# Altium PCB PAPRika PCB.PcbDoc
Units mil, origin at the board's own origin, x right, y up, seen from the top; angles counter-clockwise.
Board outline 1299.21 x 556.69 mil, 2 copper layers (Top Layer, Bottom Layer), stack 27.8 mil thick; 14 components, 8 nets, 40 pads, 3 vias.
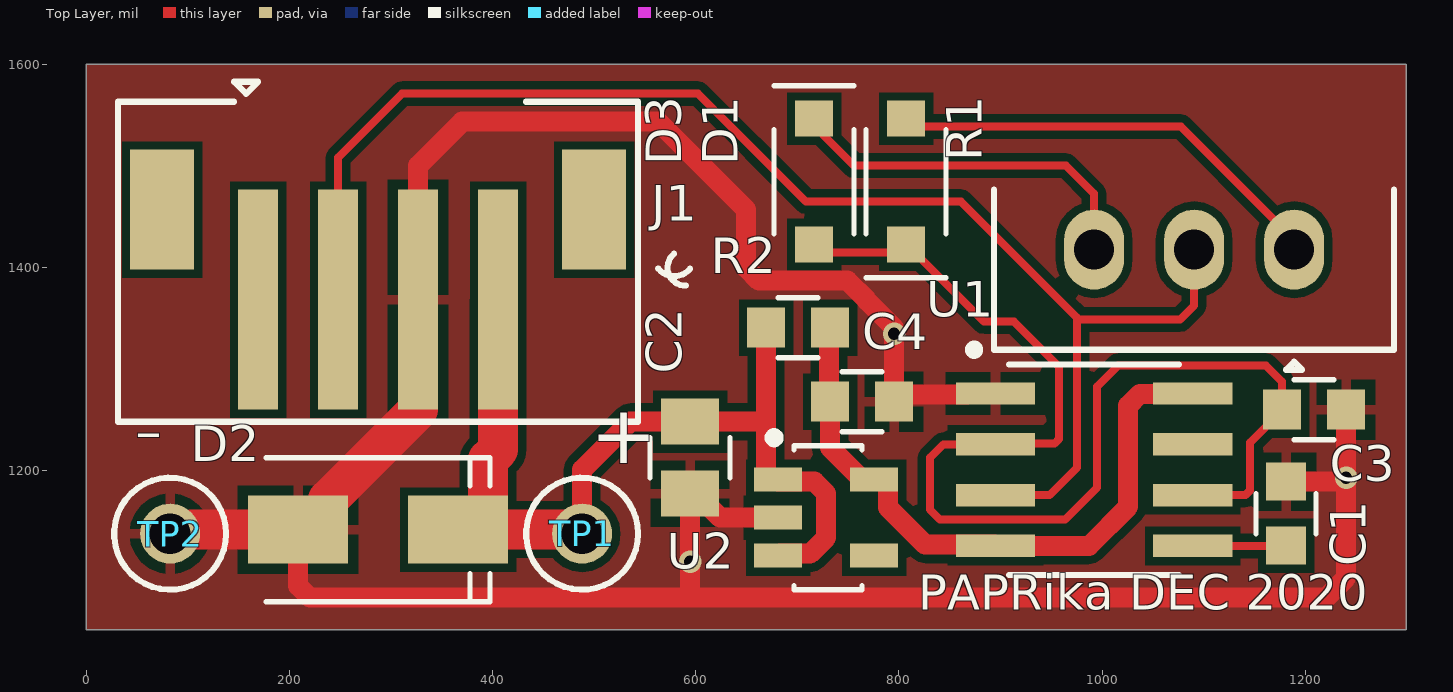
[diagram p0: Top Layer view]
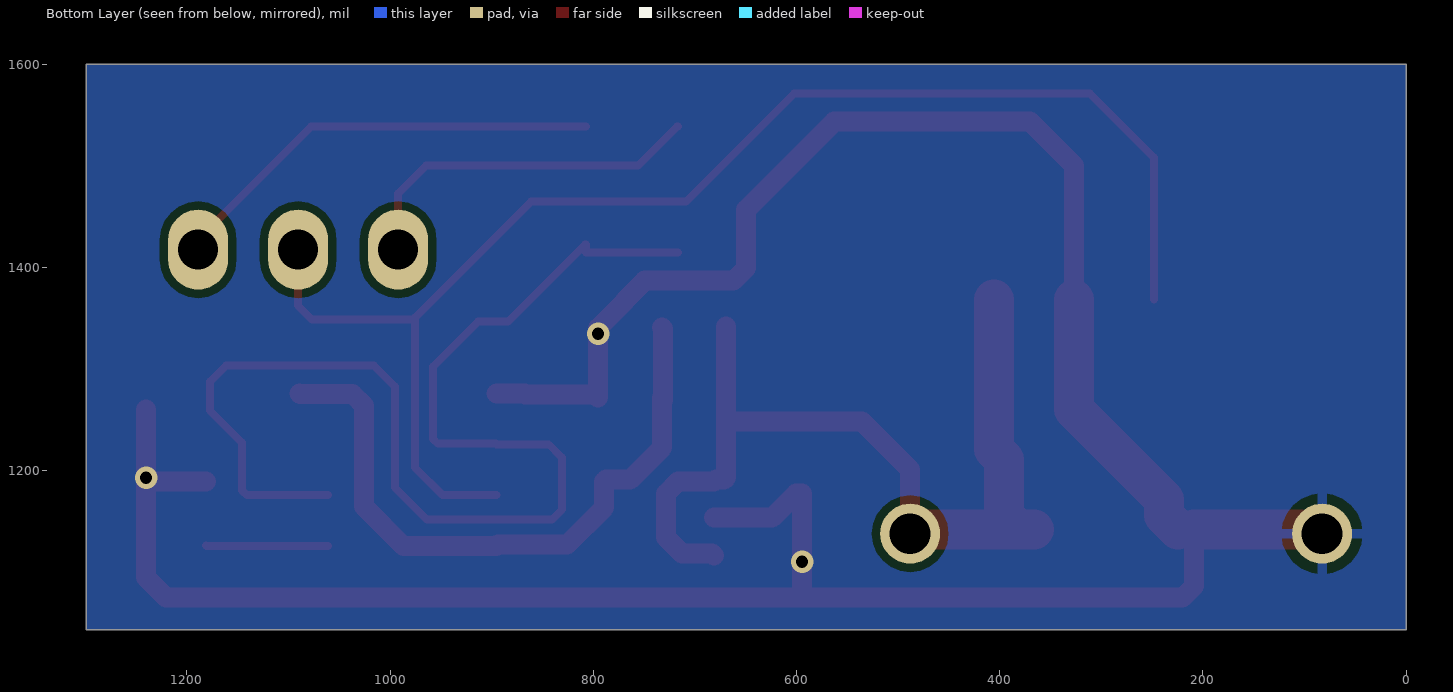
[diagram p1: Bottom Layer view, seen from below]

## Layer stack, top to bottom
Top Solder: solder mask 0.4, Solder Resist, Dk 3.5
Top Layer: signal copper 1.4
Dielectric 1: core 25, FR-4, Dk 4.2
Bottom Layer: signal copper 1.4
Bottom Solder: solder mask 0.4, Solder Resist, Dk 3.5

## Board outline
0,1043.31 1299.21,1043.31 1299.21,1600 0,1600

## Design rules (kind name [scope] priority, off if disabled: settings)
Clearance [All] p1: gap=7.87 ignorepadtopadclearanceinfootprint=FALSE
Height [All] p1: minheight=0 maxheight=1968.5 prefheight=500
HoleSize [All] p1: absolutevalues=TRUE maxlimit=393.7 minlimit=1 maxpercent=80.000 minpercent=20.000
MinimumSolderMaskSliver [All] p1: minsoldermaskwidth=1
PlaneConnect [All] p1: planeconnectstyle=Direct reliefexpansion=20 reliefentries=4 reliefconductorwidth=10 reliefairgap=10
PolygonConnect [All] p1: connectstyle=Relief reliefconductorwidth=10 reliefentries=4 polygonreliefangle="90 Angle" airgapwidth=10
RoomDefinition "PAPRika PCB" [InComponentClass('PAPRika PCB')] p1 off: confinementstyle=ConfineIn formatcopy=TRUE lockcomponents=FALSE outline 3545,60 5945,60 5945,460 3545,460
RoutingVias [All] p1: holewidth=28 width=50 viastyle="Through Hole" minholewidth=28 minwidth=50 maxholewidth=28 maxwidth=50
SilkToSilkClearance [All] p1: silktosilkclearance=3
SilkToSolderMaskClearance [IsPad] p1: minsilkscreentomaskgap=3 clearancetoexposedcopper=TRUE
SolderMaskExpansion [All] p1: expansion=4 istentingtop=FALSE
Width [All] p1: maxlimit=393.7 minlimit=7.87 preferedwidth=7.87
24 further rules are at their usual default settings.

## Components (designator, comment, footprint, x,y, rotation, side; value= is the part's Value field where it differs from the comment)
C1 "CAP 0603" CAP0603 1181.1,1157.48 r270 top value=10nF
C2 "CAP 0805" CAP0805 594.49,1212.6 r270 top value=4.7uF
C3 "CAP 0603" CAP0603 1208.66,1259.84 r0 top value=10nF
C4 "CAP 0603" CAP0603 763.78,1267.72 r0 top value=4.7uF
D1 "1N4148W-7-F" SOD-123 807.09,1484.25 r90 top
D2 "TVS Zener" DO-214AC 287.4,1141.73 r180 top
D3 "1N4148W-7-F" SOD-123 716.54,1484.25 r270 top
J1 "B4B-PH-SM4-TB(LF)(SN)" B4B-PH-SM4-TB 287.4,1456.69 r0 top locked
R1 "PTD901-2015K-B502" PTD901 1090.55,1417.32 r0 top locked value=5K
R2 "RES 0603" RES0603 700.79,1340.55 r180 top value=0
TP1 "TP-5001-RED" TP-5001-BLACK 488.19,1137.8 r0 top
TP2 "TP-5001-RED" TP-5001-BLACK 82.68,1137.8 r0 top
U1 "NE555DR" 8-D 992.13,1200.79 r0 top
U2 "AP2204K-5.0TRG1" 5-SOT23 728.35,1153.54 r270 top

## Footprints (in the part's own frame and the unit in brackets; to place one, negate y for a bottom-side part, rotate by r counter-clockwise, add the part's x,y. Pads: shape width x height; smd on the part's side, far side on the other; paste and mask are expansions set on the pad)
5-SOT23 [mm] "5-pin SOT-23 SMT Package"
  rect 0.6x1.2 smd: 1(-0.95,-1.2) 2(0,-1.2) 3(0.95,-1.2) 4(0.95,1.2) 5(-0.95,1.2)
  silkscreen extent -2.11,-1.41 1.8,0.9, body extent -1.52,-1.5 1.52,1.5, height 1.45
8-D [mil] "8-pin SOIC package, 3.9mm wide"
  rect 78x22 smd: 1(-97,75) 2(-97,25) 3(-97,-25) 4(-97,-75) 5(97,-75) 6(97,-25) 7(97,25) 8(97,75)
  silkscreen extent -122,-104 84,122, body extent -122,-98 122,99, height 69
B4B-PH-SM4-TB [mm] "JST PH 4-Pin Male Straight SMT PCB"
  rect 1x5.5 smd: 1(-3,-2.25) 2(-1,-2.25) 3(1,-2.25) 4(3,-2.25)
  rect 1.6x3 smd: M1(-5.4,0) M2(5.4,0)
  silkscreen extent -6.5,-5.3 6.5,3.2, body extent -5.98,-4.5 5.98,2.5, height 11.49
CAP0603 [mm] "0603 SMT Capacitor Footprint"
  rect 0.95x1 smd: 1(0.8,0) 2(-0.8,0)
  silkscreen extent -0.5,-0.75 0.5,0.75, body extent -0.8,-0.4 0.8,0.4, height 0.8
CAP0805 [mm] "0805 SMT Capacitor Footprint"
  rect 1.15x1.45 smd: 1(0.9,0) 2(-0.9,0)
  silkscreen extent -0.5,-1 0.5,1, body extent -1,-0.63 1,0.63, height 1
DO-214AC [mm] "DO-214AC (SMA) Diode Footprint"
  rect 2.5x1.7 smd: A(2,0) K(-2,0)
  silkscreen extent -2.8,-1.8 2.8,1.8, body extent -2.79,-1.46 2.8,1.46, height 2.35
PTD901 [mm] "POT 20K OHM 1/20W CARBON LINEAR"
  oval 1.5x2 hole 1: 1(2.5,0) 2(0,0) 3(-2.5,0)
  silkscreen extent -5,-3 5,1.5, body extent -4.8,-2.2 4.8,19.95, height 11.55
RES0603 [mm] "0603 SMT Resistor  Footprint"
  rect 0.95x1 smd: 1(0.8,0) 2(-0.8,0)
  silkscreen extent -0.5,-0.75 0.5,0.75, body extent -0.8,-0.4 0.8,0.4, height 0.8
SOD-123 [mm] "SOD-123"
  rect 0.9x0.95 smd: A(1.575,0) K(-1.575,0)
  silkscreen extent -2.4,-1 1.3,1, body extent -1.3,-0.8 1.3,0.8, height 1.35
TP-5001-BLACK [mm] "Keystone Thru Hole Mini Testpoint"
  round 1.5 hole 1.02: 1(0,0)
  silkscreen extent -1.4,-1.4 1.4,1.4, body extent -1.27,-1.27 1.27,1.27, height 4.35

## Part data
C1 C3: "Cap 0603", PCB Package=0603
C2: "Cap 0805", PCB Package=0805, Voltage=50V
C4: "Cap 0603", PCB Package=0603, Voltage=10V
D1 D3: "Ultra-Fast Signal Diode, Silicon, 100V, 300mA", Manufacturer="Diodes Inc.", PCB Package=SOD-123, Reverse Voltage=100V, I(max)=300mA, Manufacturer P/N=1N4148W-7-F, Type="Standard Fast Recovery"
D2: library part SMAJ9.0A, "TVS DIODE 9V 15.4V DO214AC", Manufacturer=Littelfuse, PCB Package=DO-214AC, I(pulse)=26A, Manufacturer P/N=SMAJ9.0A, Vbr(min)=10.0V, Vr=9.0V
J1: "JST 4-pin Male PCB Straight 2.00mm", Manufacturer=JST, Manufacturer P/N=B4B-PH-SM4-TB(LF)(SN)
R1: "POT 5K OHM 1/20W CARBON LINEAR", Manufacturer=Bourns, PCB Package=PTD901, Manufacturer P/N=PTD901-2015K-B502
R2: "Res 0603", PCB Package=0603, Do Not Populate=DNP
TP1 TP2: library part TP-5001-BLACK, "Keystone 5001 BLACK TH Mini Testpoint", Manufacturer=Keystone, Manufacturer P/N=5001, Do Not Populate=DNP, PCB Package=TP-5001-BLACK
U1: "IC OSC SGL TIMER 100KHZ 8-SOIC", Manufacturer="Texas Instruments", PCB Package=8-SOIC, Manufacturer P/N=NE555DR
U2: "IC REG LINEAR 5V 150MA SOT23-5", Manufacturer="Diodes Inc.", PCB Package=5-SOT23, Manufacturer P/N=AP2204K-5.0TRG1

## Via types
v1: diameter 22, hole 12, Top Layer to Bottom Layer, tented both sides, 3 vias

## Nets (pads, with @x,y where several pads share a name; then routed paths per layer and width w, separated by ;. In a path a pad name is that pad's centre, name@x,y a point inside that pad or via, vN(x,y) a via of type N, cw(c..) or ccw(c..) an arc to the next point about the centre after c; other vN are vias at no path point)
5V: C4.2 R2.2 U1.4 U1.8 U2.5 | length 653.5
  Top Layer w19.68: C4.2 731.3,1268.69 731.3,1339.57 R2.2 ; C4.2@732.29,1271.64 732.29,1222.43 763.78,1190.94 U2.5 787.4,1190.94 789.37,1188.98 789.37,1163.39 825.81,1126.94 U1.4@893.97,1126.94 ; U1.4 987.01,1125.79 1025.59,1164.37 1025.59,1263.87 1037.12,1275.4 1088.74,1275.4 U1.8
GND: C1.2 C2.1 C3.1 C4.1 D2.A J1.3 TP2.1 U1.1 U2.2 | length 2821.9
  Top Layer w19.68: D2.A@224.41,1141.73 D2.A 208.66,1086.33 220.19,1074.8 590.55,1074.8 ; J1.3 326.77,1500 370.08,1543.31 562.99,1543.31 649.61,1456.69 649.61,1399.33 662.12,1386.81 749.47,1386.81 768.7,1367.58 768.7,1366.9 795.28,1340.33 795.28,1271.65 798.25,1274.63 U1.1@867.13,1274.63 ; U2.2 624.02,1153.54 600.39,1177.17 C2.1 594.49,1078.74 590.55,1074.8 ; U1.1@867.13,1275.79 U1.1 ; C1.2 1236.22,1188.98 v1@1240.16,1185.04 ; C3.1 v1@1240.16,1185.04 ; 590.55,1074.8 1220.47,1074.8 1240.16,1094.49 v1@1240.16,1185.04
  Top Layer w39.37: TP2.1@103.75,1141.73 D2.A ; D2.A@224.41,1141.73 238.19,1155.51 238.19,1171.26 326.77,1259.84 J1.3
  other v1: 594.49,1110.24 1240.16,1192.91 795.28,1334.65
NetC1_1: C1.1 U1.5 | length 120.1
  Top Layer w7.87: U1.5@1061.13,1125.79 U1.5 1180.91,1125.79 C1.1
NetC3_2: C3.2 D1.K D3.A U1.2 U1.6 | length 1240.3
  Top Layer w7.87: D3.A@716.54,1414.37 807.09,1414.37 D1.K 808.07,1422.24 883.86,1346.46 913.39,1346.46 957.68,1302.17 957.68,1230.99 953.06,1226.38 895.72,1226.38 U1.2 843.9,1225.79 830.71,1212.6 830.71,1161.42 840.55,1151.57 963.58,1151.57 995.08,1183.07 995.08,1282.48 1015.75,1303.15 1161.42,1303.15 1177.16,1287.4 C3.2 1177.16,1258.85 1145.67,1227.36 1145.67,1180.4 1141.06,1175.79 U1.6 U1.6@1061.13,1175.79
NetD1_A: D1.A R1.1 | length 437.8
  Top Layer w7.87: D1.A@807.09,1538.39 1077.76,1538.39 1188.98,1427.17 R1.1
NetD3_K: D3.K R1.3 | length 358
  Top Layer w7.87: D3.K@716.54,1538.39 717.52,1538.39 755.91,1500 964.57,1500 992.13,1472.44 R1.3
PWM: J1.2 R1.2 U1.3 | length 1399.6
  Top Layer w7.87: J1.2 248.03,1507.87 311.02,1570.87 602.36,1570.87 708.66,1464.57 861.22,1464.57 975.39,1350.39 975.39,1202.76 948.43,1175.79 U1.3 ; 975.39,1348.43 1076.77,1348.43 1090.55,1362.2 R1.2
VIN: C2.2 D2.K J1.4 R2.1 TP1.1 U2.1 U2.3 | length 920.9
  Top Layer w19.68: TP1.1 488.19,1200.79 535.44,1248.03 C2.2 669.29,1248.03 ; R2.1@669.29,1341.54 R2.1 669.29,1248.03 ; U2.3 683.07,1118.11 712.6,1118.11 728.35,1133.86 728.35,1177.45 716.82,1188.98 681.1,1188.98 679.13,1190.94 671.26,1190.94 669.29,1192.91 669.29,1248.03
  Top Layer w39.37: D2.K D2.K@381.89,1141.73 ; J1.4 405.51,1220.47 395.67,1210.63 395.67,1155.51 D2.K@381.89,1141.73 ; TP1.1@474.99,1141.73 D2.K@381.89,1141.73
pads on no net: J1.1 J1.M1 J1.M2 U1.7 U2.4

## Polygon pours and split planes (outlines as drawn)
GND on Top Layer "TOP-GND" (solid, remove dead copper, pour order 0): 0,1600 0,1043.31 1299.21,1043.31 1299.21,1600
GND on Bottom Layer "BOT-GND" (solid, pour order 1): 0,1043.31 0,1600 1299.21,1600 1299.21,1043.31

## Silkscreen, mask and mechanical layers (free items; w line width, h text height)
Top Overlay:
  lines w5.98: 563.13,1398.73 ccw(c578.86,1411.29) 594.49,1398.62 ; 578.74,1413.39 ccw(c590.02,1399.69) 590.45,1381.96
  text "-" at 47.24,1195.78 h98.43
  text "+" at 496.06,1187.8 h98.43
  text "PAPRika DEC 2020" at 818.9,1051.83 h59.06
Mechanical 3:
  the board outline again, w10
Mechanical 16:
  drawing of 67 lines, arcs and shapes, not listed
  text "REV" at 13283.46,7480.32 h78.74
  text "ENGINEER" at 13614.17,7480.32 h78.74
  text "DATE" at 12858.27,7476.38 h78.74
  text "COMMENT" at 14397.64,7476.38 h78.74
  text "*" at 13283.46,7389.76 h59.06
  text "*" at 13614.17,7389.76 h59.06
  text "*" at 12858.27,7385.83 h59.06
  text "INITIAL RELEASE" at 14397.64,7385.83 h78.74
  text "*" at 13283.46,7299.21 h78.74
  text "*" at 13614.17,7299.21 h78.74
  text "*" at 12858.27,7295.28 h78.74
  text "*" at 14397.64,7295.28 h78.74
  text "*" at 13283.46,7208.66 h78.74
  text "*" at 13614.17,7208.66 h78.74
  text "*" at 12858.27,7204.72 h78.74
  text "*" at 14397.64,7204.72 h78.74
  text "*" at 13283.46,7118.11 h78.74
  text "*" at 13614.17,7118.11 h78.74
  text "*" at 12858.27,7114.17 h78.74
  text "*" at 14397.64,7114.17 h78.74
  text "*" at 13283.46,7027.56 h78.74
  text "*" at 13614.17,7027.56 h78.74
  text "*" at 12858.27,7023.62 h78.74
  text "*" at 14397.64,7023.62 h78.74
  text "*" at 13283.46,6937.01 h78.74
  text "*" at 13614.17,6937.01 h78.74
  text "*" at 12858.27,6933.07 h78.74
  text "*" at 14397.64,6933.07 h78.74
  text "1. LEAD-FREE SOLDER" at 9897.64,3236.22 h196.85
  text "2. IPC-A-610 CLASS 2 ASSEMBLY" at 9897.64,3043.31 h196.85
  text "3. COMPONENTS ON TOP SIDE ONLY" at 9900,2860 h196.85
  text "ENGINEER:" at 12130.12,251.18 h45
  text "TITLE:" at 13630.12,251.18 h45
  text "E. CHIU" at 12436.42,122.05 h118.11
  text "PCB TITLE" at 13869.49,-39.37 h118.11
  text "PCB DESIGNER:" at 12130.12,-43.82 h45
  text "E. CHIU" at 12433.07,-169.29 h118.11
  text "DATE:" at 12130.12,-348.82 h45
  text "PART NO.:" at 13630.12,-348.82 h45
  text "REV:" at 15730.12,-348.82 h45
  text "DeepFlight" at 10830.12,-448.82 h118.11
  text "PCB PN" at 13940.35,-460.63 h118.11
  text ".PRINT_DATE" at 12180.12,-468.82 h70
  text "*" at 15861.61,-472.44 h118.11
  text "1150 Brickyard Cove Rd. #102" at 10830.12,-548.82 h98.43
  text "Richmond, CA 94801" at 10830.12,-648.82 h98.43
  text "FILE NAME:" at 12130.12,-648.82 h45
  text "DWG NO:" at 13630.12,-648.82 h45
  text "SCALE:" at 15730.12,-648.82 h45
  text ".PCB_FILE_NAME_NO_PATH" at 12180.12,-768.82 h70
Drill Drawing:
  drawing of 191 lines, arcs and shapes, not listed
  text "1. FINISH: HASL" at 9846.46,6874.02 h196.85
  text "2. SOLDERMASK: LPI WHITE" at 9846.46,6637.8 h196.85
  text "3. SILKSCREEN: BLACK" at 9846.46,6401.57 h196.85
  text "4. 6MIL TRACE/6MIL SPACE" at 9846.46,6165.35 h196.85
  text "5. ELECTRICAL TEST" at 9850,5940 h196.85
  text "Layer" at 9958.35,4819.21 h60
  text "Name" at 10368.27,4819.21 h60
  text "Material" at 11298.01,4819.21 h60
  text "Thickness" at 12157.78,4819.21 h60
  text "Constant" at 12807.61,4819.21 h60
  text "Board Layer Stack" at 13377.48,4819.21 h60
  text "Top Overlay" at 10368.27,4699.21 h60
  text "Top Solder" at 10368.27,4579.21 h60
  text "Solder Resist" at 11298.01,4579.21 h60
  text "0.40mil" at 12157.78,4579.21 h60
  text "3.5" at 12807.61,4579.21 h60
  text "1" at 9958.35,4459.21 h60
  text "Top Layer" at 10368.27,4459.21 h60
  text "Copper" at 11298.01,4459.21 h60
  text "1.40mil" at 12157.78,4459.21 h60
  text "Dielectric 1" at 10368.27,4339.21 h60
  text "FR-4" at 11298.01,4339.21 h60
  text "25.00mil" at 12157.78,4339.21 h60
  text "4.2" at 12807.61,4339.21 h60
  text "2" at 9958.35,4219.21 h60
  text "Bottom Layer" at 10368.27,4219.21 h60
  text "Copper" at 11298.01,4219.21 h60
  text "1.40mil" at 12157.78,4219.21 h60
  text "Bottom Solder" at 10368.27,4099.21 h60
  text "Solder Resist" at 11298.01,4099.21 h60
  text "0.40mil" at 12157.78,4099.21 h60
  text "3.5" at 12807.61,4099.21 h60
  text "Bottom Overlay" at 10368.27,3979.21 h60
  text ".Legend" at 10000,728.35 h59.06

## Dimensions
0,0 to 1299.21,1043.31 on Drill Drawing
0,1043.31 to 0,1600 on Drill Drawing